# EAGLE board stencil (EAGLE 9.6.2)
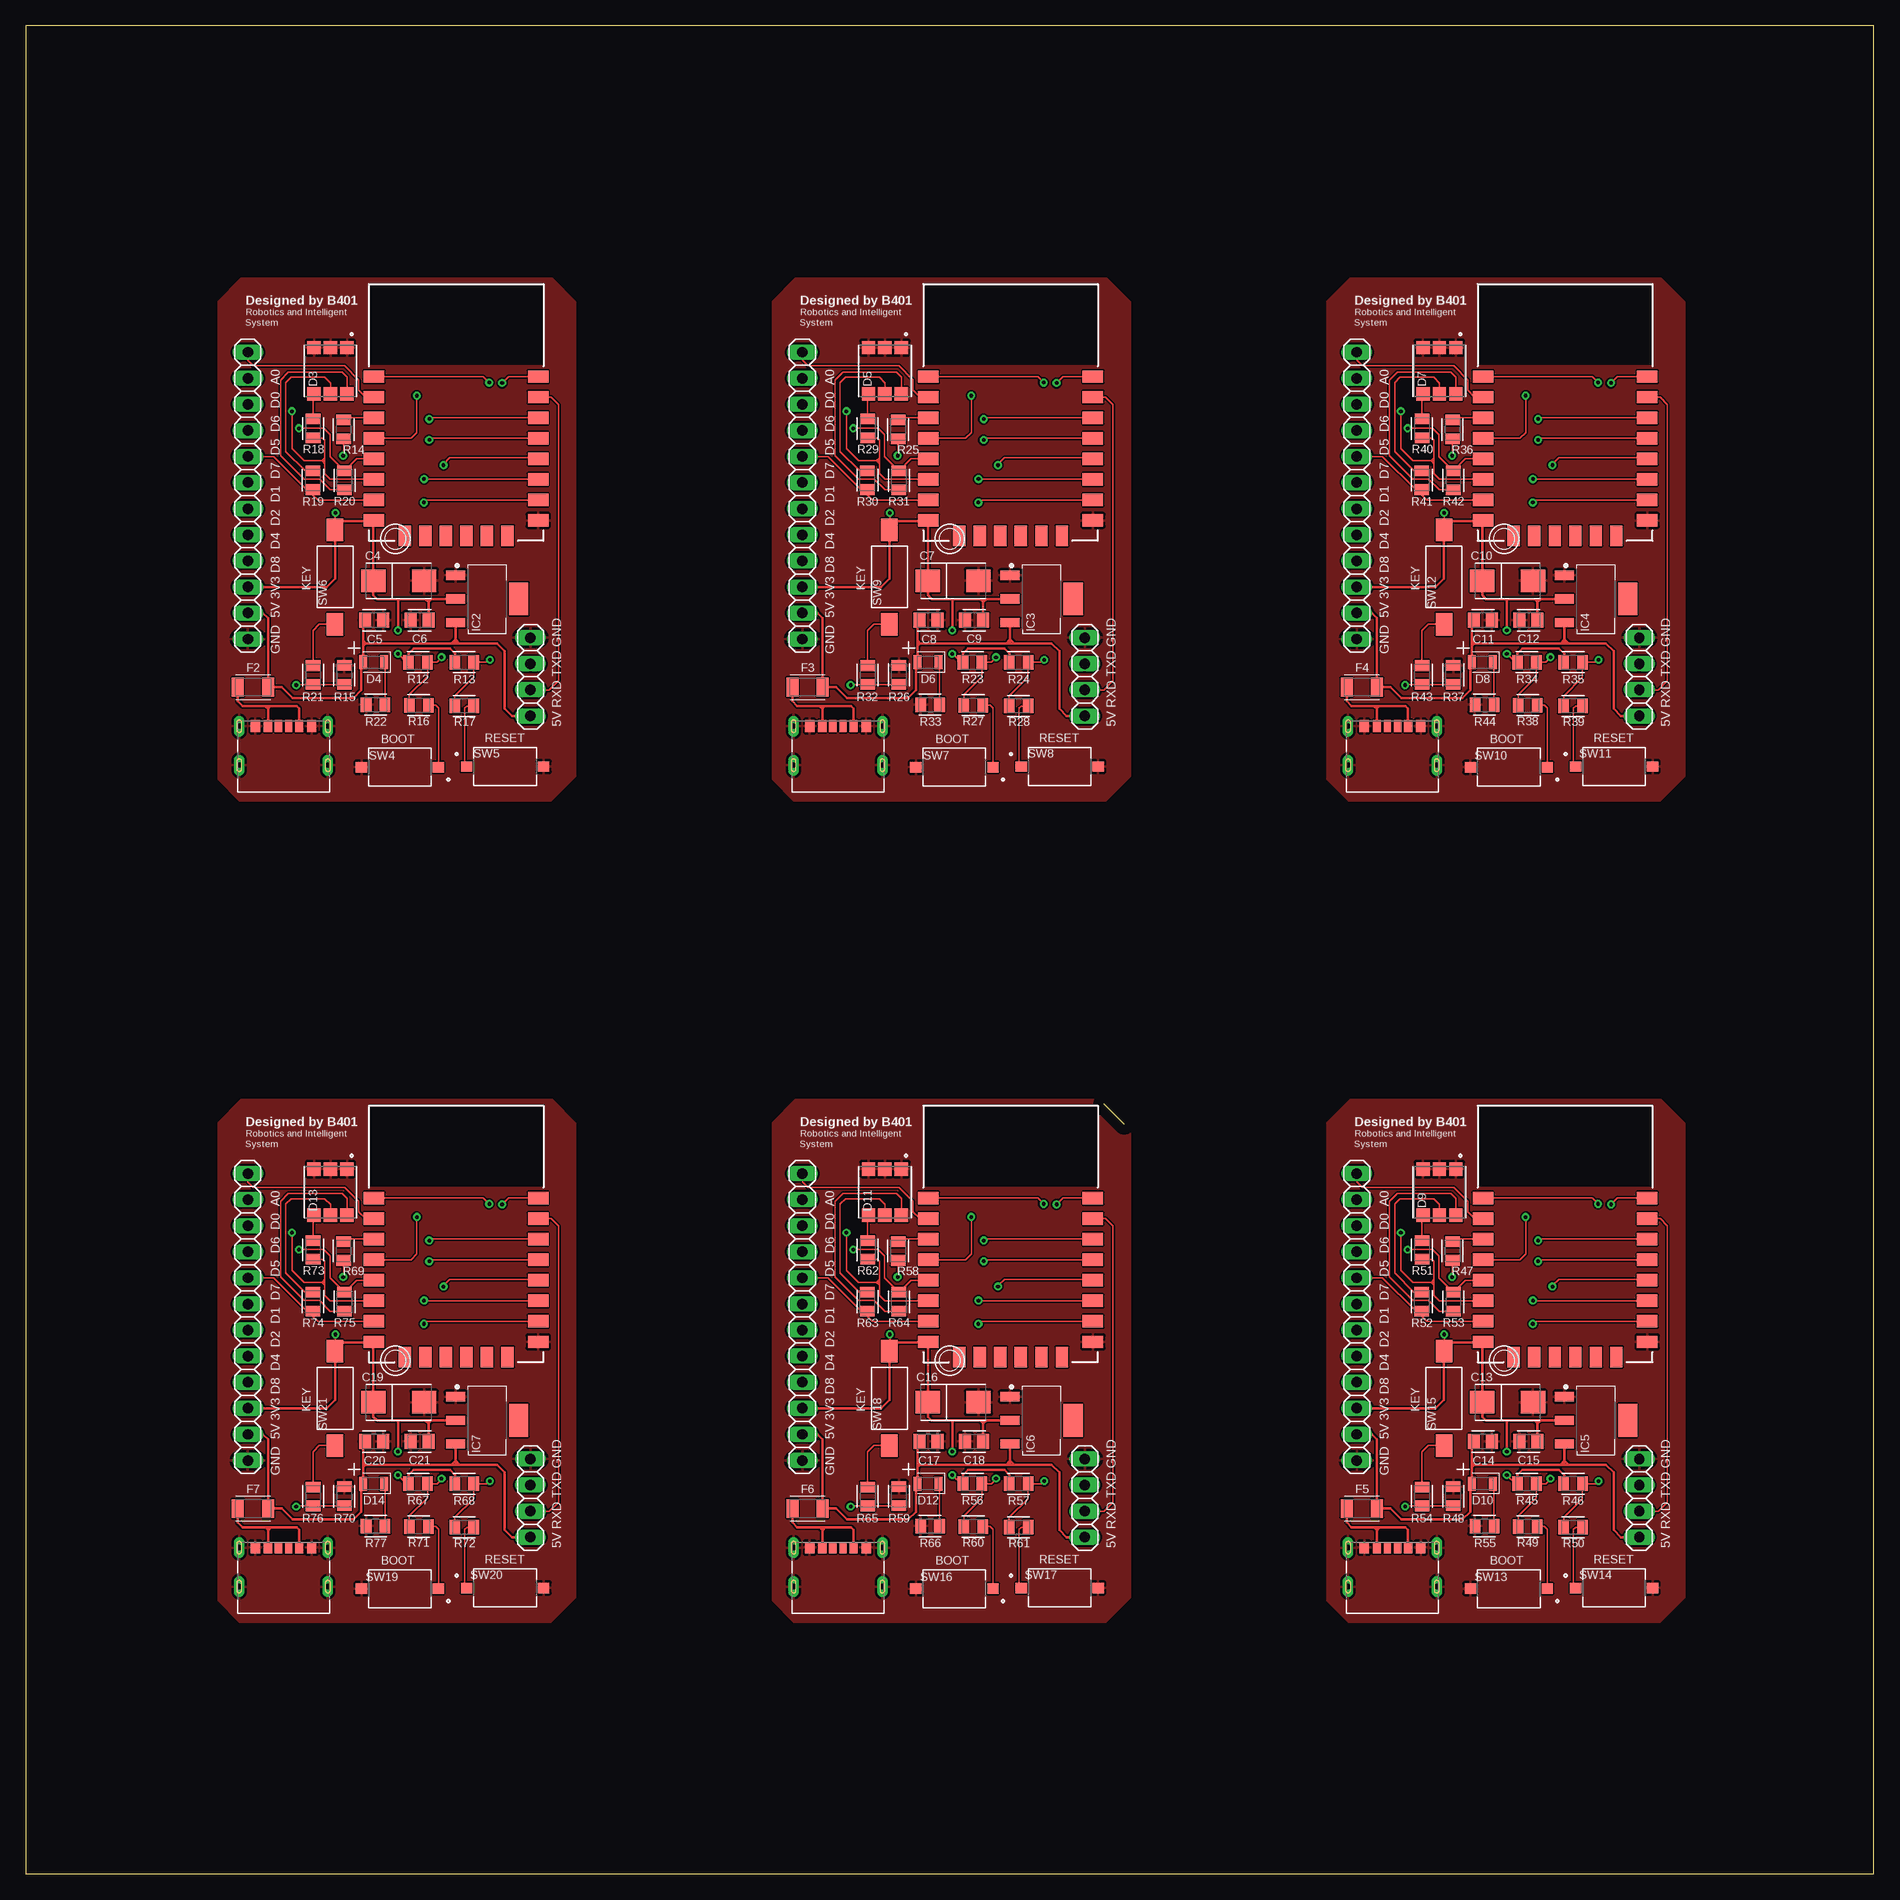
[diagram p0: board, top side]
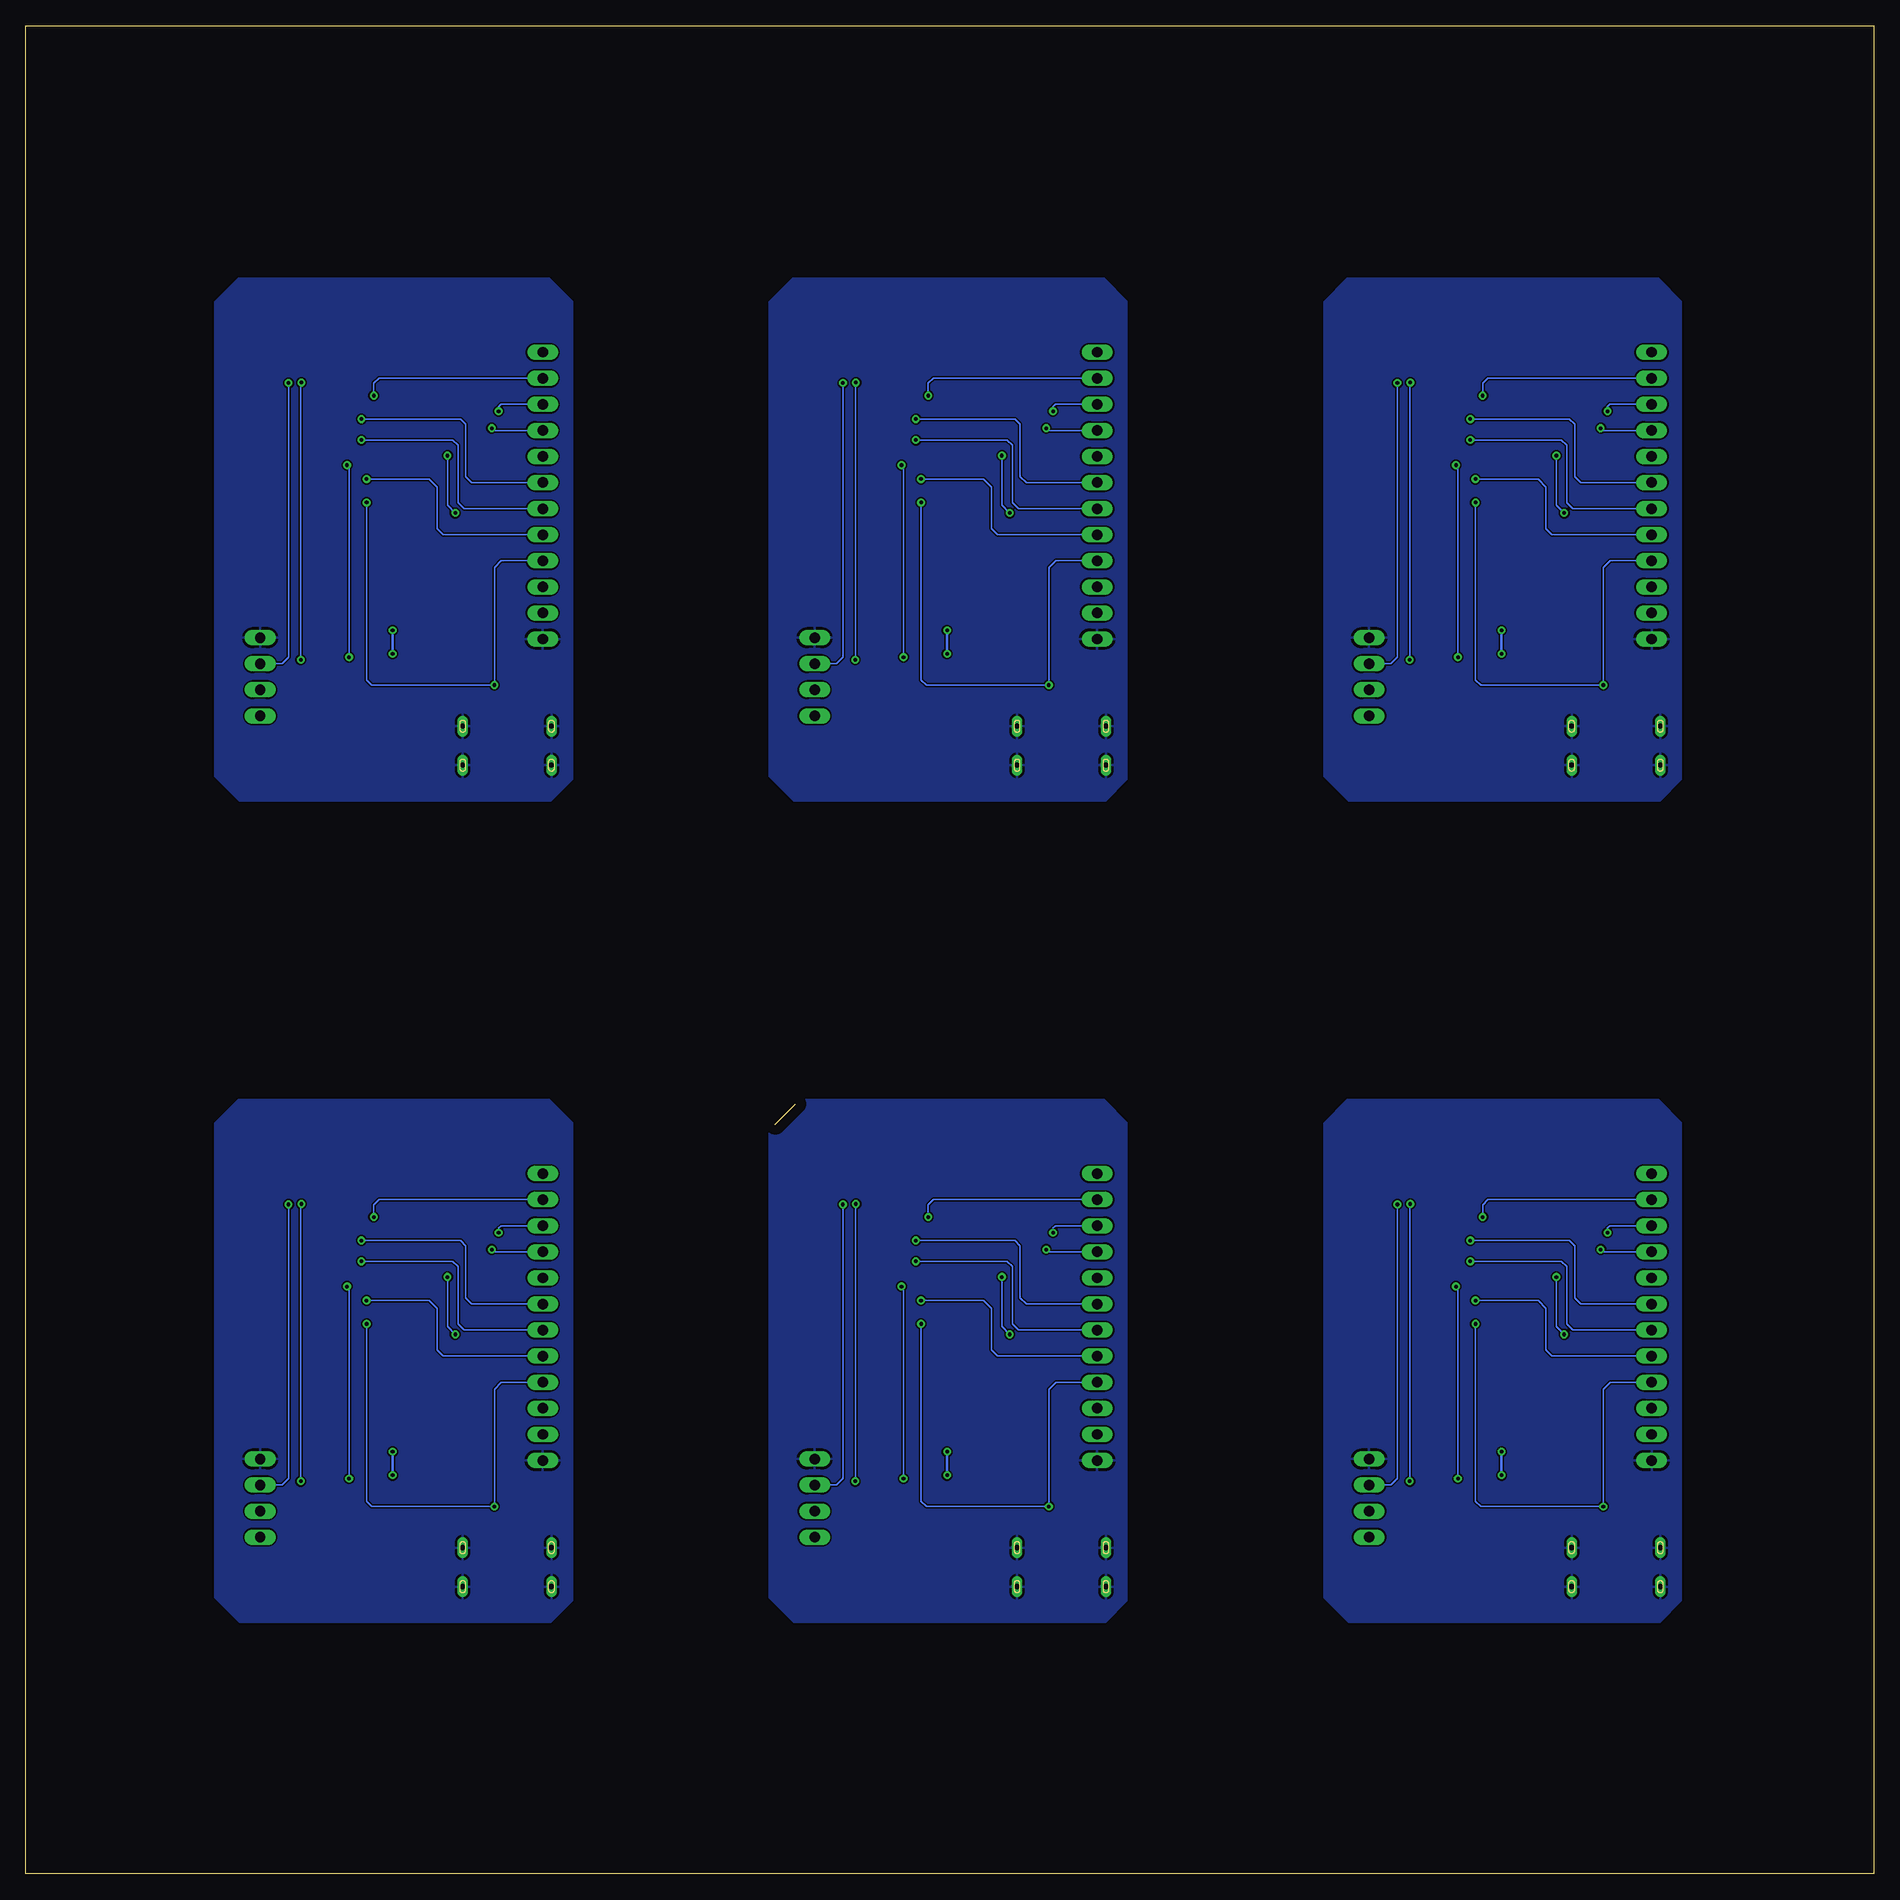
[diagram p1: board, bottom side, seen from below]

Size 180 x 180 mm. Coordinates in mm from the lower left corner, seen from the top.
Outline: 107,73 105,75
Outline: 0,0 180,0 180,180 0,180 0,0
Copper layers (1*16): Top 0.035mm / dielectric 1.5mm / Bottom 0.035mm
Design rules "default *": minimum track width 6mil, minimum drill 0.3mm, track to track 6mil, track to pad 6mil, pad to pad 6mil, via to via 6mil, smd to smd 6mil, copper to edge 40mil, drill to drill 6mil, minimum pad ring 10mil, minimum via ring 8mil, stop-mask expansion 4mil, vias tented up to drill 0mil, thermal gap 10mil

## Footprints (pad centres in the part's own frame; a part is rotated, then mirrored left to right if it is on the bottom)
1X12 = drill 1.016 long: 1 -13.97,0; 2 -11.43,0; 3 -8.89,0; 4 -6.35,0; 5 -3.81,0; 6 -1.27,0; 7 1.27,0; 8 3.81,0; 9 6.35,0; 10 8.89,0; 11 11.43,0; 12 13.97,0
CAPM6032X280 = smd 2.368 x 2.204: 1 -2.471,0; 2 2.471,0
CAPC2012X110 = smd 1.165 x 1.465: 1 -0.875,0; 2 0.875,0
RGB-5050 = smd 1.3 x 1.3: 1 -2.25,1.6; 2 -2.25,0; 3 -2.25,-1.6; 4 2.25,-1.6; 5 2.25,0; 6 2.25,1.6
LEDC2012X110N_FLAT-R = smd 0.762 x 1.362: A 1.025,0; C -1.025,0
ESP-12F = smd 2 x 1.2: 1 -8,3.48; 2 -8,1.48; 3 -8,-0.52; 4 -8,-2.52; 5 -8,-4.52; 6 -8,-6.52; 7 -8,-8.52; 8 -8,-10.52; 15 8,-10.52; 16 8,-8.52; 17 8,-6.52; 18 8,-4.52; 19 8,-2.52; 20 8,-0.52; 21 8,1.48; 22 8,3.48 | smd 1.2 x 2: 9 -5,-12; 10 -3,-12; 11 -1,-12; 12 1,-12; 13 3,-12; 14 5,-12
FUSC3215X82N = smd 1.165 x 1.814: 1 -1.475,0; 2 1.475,0
SOT230P700X170-4 = smd 1.86 x 0.898: 1 -3.075,2.3; 2 -3.075,0; 3 -3.075,-2.3 | smd 1.86 x 3.189: 4 3.075,0
SOCKET-C = smd 0.7 x 1.15: A5 -0.5,0.005; B5 0.5,0.005 | smd 0.8 x 1.15: A9 1.52,0.005; B9 -1.52,0.005 | smd 0.9 x 1.15: A12 2.75,0.005; B12 -2.75,0.005 | drill 0.5 pad 1 long: S1 -4.32,0; S2 4.32,0; S3 -4.32,-3.8; S4 4.32,-3.8
RESC2012X65 = smd 1.031 x 1.42: 1 -0.919,0; 2 0.919,0
SWITCH-2P = smd 1.1 x 1: 1 -3.75,0; 2 3.75,0
SW_1437566-3 = smd 2.18 x 1.6: 1 -4.6,0; 2 4.6,0
1X04 = drill 1.016 long: 1 -3.81,0; 2 -1.27,0; 3 1.27,0; 4 3.81,0

## Placement (x,y rotation side)
BREAKOUT1  PINHD-1X12-BACKUP_1X12M  [1X12]  21.64,134.23 90 top
BREAKOUT2  PINHD-1X12-BACKUP_1X12M  [1X12]  75.64,134.23 90 top
BREAKOUT3  PINHD-1X12-BACKUP_1X12M  [1X12]  129.64,134.23 90 top
BREAKOUT4  PINHD-1X12-BACKUP_1X12M  [1X12]  129.64,54.23 90 top
BREAKOUT5  PINHD-1X12-BACKUP_1X12M  [1X12]  75.64,54.23 90 top
BREAKOUT6  PINHD-1X12-BACKUP_1X12M  [1X12]  21.64,54.23 90 top
C4  100µ  [CAPM6032X280]  36.33,125.93 180 top
C5  10µ  [CAPC2012X110]  33.94,122.11 0 top
C6  10µ  [CAPC2012X110]  38.37,122.1 180 top
C7  100µ  [CAPM6032X280]  90.33,125.93 180 top
C8  10µ  [CAPC2012X110]  87.94,122.11 0 top
C9  10µ  [CAPC2012X110]  92.37,122.1 180 top
C10  100µ  [CAPM6032X280]  144.33,125.93 180 top
C11  10µ  [CAPC2012X110]  141.94,122.11 0 top
C12  10µ  [CAPC2012X110]  146.37,122.1 180 top
C13  100µ  [CAPM6032X280]  144.33,45.93 180 top
C14  10µ  [CAPC2012X110]  141.94,42.11 0 top
C15  10µ  [CAPC2012X110]  146.37,42.1 180 top
C16  100µ  [CAPM6032X280]  90.33,45.93 180 top
C17  10µ  [CAPC2012X110]  87.94,42.11 0 top
C18  10µ  [CAPC2012X110]  92.37,42.1 180 top
C19  100µ  [CAPM6032X280]  36.33,45.93 180 top
C20  10µ  [CAPC2012X110]  33.94,42.11 0 top
C21  10µ  [CAPC2012X110]  38.37,42.1 180 top
D3  RGB-5050  [RGB-5050]  29.69,146.39 270 top
D4  LED_RED  [LEDC2012X110N_FLAT-R]  33.88,118 180 top
D5  RGB-5050  [RGB-5050]  83.69,146.39 270 top
D6  LED_RED  [LEDC2012X110N_FLAT-R]  87.88,118 180 top
D7  RGB-5050  [RGB-5050]  137.69,146.39 270 top
D8  LED_RED  [LEDC2012X110N_FLAT-R]  141.88,118 180 top
D9  RGB-5050  [RGB-5050]  137.69,66.39 270 top
D10  LED_RED  [LEDC2012X110N_FLAT-R]  141.88,38 180 top
D11  RGB-5050  [RGB-5050]  83.69,66.39 270 top
D12  LED_RED  [LEDC2012X110N_FLAT-R]  87.88,38 180 top
D13  RGB-5050  [RGB-5050]  29.69,66.39 270 top
D14  LED_RED  [LEDC2012X110N_FLAT-R]  33.88,38 180 top
ESP-12E/F1  ESP-12F  [ESP-12F]  41.93,142.33 0 top
ESP-12E/F2  ESP-12F  [ESP-12F]  95.93,142.33 0 top
ESP-12E/F3  ESP-12F  [ESP-12F]  149.93,142.33 0 top
ESP-12E/F4  ESP-12F  [ESP-12F]  149.93,62.33 0 top
ESP-12E/F5  ESP-12F  [ESP-12F]  95.93,62.33 0 top
ESP-12E/F6  ESP-12F  [ESP-12F]  41.93,62.33 0 top
F2  FUSE PTC 1A  [FUSC3215X82N]  22.14,115.58 180 top
F3  FUSE PTC 1A  [FUSC3215X82N]  76.14,115.58 180 top
F4  FUSE PTC 1A  [FUSC3215X82N]  130.14,115.58 180 top
F5  FUSE PTC 1A  [FUSC3215X82N]  130.14,35.58 180 top
F6  FUSE PTC 1A  [FUSC3215X82N]  76.14,35.58 180 top
F7  FUSE PTC 1A  [FUSC3215X82N]  22.14,35.58 180 top
IC2  NCP1117ST33T3G  [SOT230P700X170-4]  44.95,124.17 0 top
IC3  NCP1117ST33T3G  [SOT230P700X170-4]  98.95,124.17 0 top
IC4  NCP1117ST33T3G  [SOT230P700X170-4]  152.95,124.17 0 top
IC5  NCP1117ST33T3G  [SOT230P700X170-4]  152.95,44.17 0 top
IC6  NCP1117ST33T3G  [SOT230P700X170-4]  98.95,44.17 0 top
IC7  NCP1117ST33T3G  [SOT230P700X170-4]  44.95,44.17 0 top
POWER1  SOCKET-C  [SOCKET-C]  25.12,111.77 0 top
POWER2  SOCKET-C  [SOCKET-C]  79.12,111.77 0 top
POWER3  SOCKET-C  [SOCKET-C]  133.12,111.77 0 top
POWER4  SOCKET-C  [SOCKET-C]  133.12,31.77 0 top
POWER5  SOCKET-C  [SOCKET-C]  79.12,31.77 0 top
POWER6  SOCKET-C  [SOCKET-C]  25.12,31.77 0 top
R12  10K  [RESC2012X65]  38.21,118 180 top
R13  10k  [RESC2012X65]  42.71,118 180 top
R14  10K  [RESC2012X65]  30.97,140.67 270 top
R15  10K  [RESC2012X65]  31.04,116.78 90 top
R16  470  [RESC2012X65]  38.29,113.82 0 top
R17  470  [RESC2012X65]  42.71,113.75 0 top
R18  100  [RESC2012X65]  28,140.77 90 top
R19  100  [RESC2012X65]  27.98,135.73 90 top
R20  100  [RESC2012X65]  31.05,135.72 270 top
R21  470  [RESC2012X65]  28,116.75 270 top
R22  100  [RESC2012X65]  34.08,113.87 0 top
R23  10K  [RESC2012X65]  92.21,118 180 top
R24  10k  [RESC2012X65]  96.71,118 180 top
R25  10K  [RESC2012X65]  84.97,140.67 270 top
R26  10K  [RESC2012X65]  85.04,116.78 90 top
R27  470  [RESC2012X65]  92.29,113.82 0 top
R28  470  [RESC2012X65]  96.71,113.75 0 top
R29  100  [RESC2012X65]  82,140.77 90 top
R30  100  [RESC2012X65]  81.98,135.73 90 top
R31  100  [RESC2012X65]  85.05,135.72 270 top
R32  470  [RESC2012X65]  82,116.75 270 top
R33  100  [RESC2012X65]  88.08,113.87 0 top
R34  10K  [RESC2012X65]  146.21,118 180 top
R35  10k  [RESC2012X65]  150.71,118 180 top
R36  10K  [RESC2012X65]  138.97,140.67 270 top
R37  10K  [RESC2012X65]  139.04,116.78 90 top
R38  470  [RESC2012X65]  146.29,113.82 0 top
R39  470  [RESC2012X65]  150.71,113.75 0 top
R40  100  [RESC2012X65]  136,140.77 90 top
R41  100  [RESC2012X65]  135.98,135.73 90 top
R42  100  [RESC2012X65]  139.05,135.72 270 top
R43  470  [RESC2012X65]  136,116.75 270 top
R44  100  [RESC2012X65]  142.08,113.87 0 top
R45  10K  [RESC2012X65]  146.21,38 180 top
R46  10k  [RESC2012X65]  150.71,38 180 top
R47  10K  [RESC2012X65]  138.97,60.67 270 top
R48  10K  [RESC2012X65]  139.04,36.78 90 top
R49  470  [RESC2012X65]  146.29,33.82 0 top
R50  470  [RESC2012X65]  150.71,33.75 0 top
R51  100  [RESC2012X65]  136,60.77 90 top
R52  100  [RESC2012X65]  135.98,55.73 90 top
R53  100  [RESC2012X65]  139.05,55.72 270 top
R54  470  [RESC2012X65]  136,36.75 270 top
R55  100  [RESC2012X65]  142.08,33.87 0 top
R56  10K  [RESC2012X65]  92.21,38 180 top
R57  10k  [RESC2012X65]  96.71,38 180 top
R58  10K  [RESC2012X65]  84.97,60.67 270 top
R59  10K  [RESC2012X65]  85.04,36.78 90 top
R60  470  [RESC2012X65]  92.29,33.82 0 top
R61  470  [RESC2012X65]  96.71,33.75 0 top
R62  100  [RESC2012X65]  82,60.77 90 top
R63  100  [RESC2012X65]  81.98,55.73 90 top
R64  100  [RESC2012X65]  85.05,55.72 270 top
R65  470  [RESC2012X65]  82,36.75 270 top
R66  100  [RESC2012X65]  88.08,33.87 0 top
R67  10K  [RESC2012X65]  38.21,38 180 top
R68  10k  [RESC2012X65]  42.71,38 180 top
R69  10K  [RESC2012X65]  30.97,60.67 270 top
R70  10K  [RESC2012X65]  31.04,36.78 90 top
R71  470  [RESC2012X65]  38.29,33.82 0 top
R72  470  [RESC2012X65]  42.71,33.75 0 top
R73  100  [RESC2012X65]  28,60.77 90 top
R74  100  [RESC2012X65]  27.98,55.73 90 top
R75  100  [RESC2012X65]  31.05,55.72 270 top
R76  470  [RESC2012X65]  28,36.75 270 top
R77  100  [RESC2012X65]  34.08,33.87 0 top
SW4  SWITCH-2P  [SWITCH-2P]  36.45,107.78 180 top
SW5  SWITCH-2P  [SWITCH-2P]  46.7,107.84 0 top
SW6  SWITCH  [SW_1437566-3]  30.13,126.31 90 top
SW7  SWITCH-2P  [SWITCH-2P]  90.45,107.78 180 top
SW8  SWITCH-2P  [SWITCH-2P]  100.7,107.84 0 top
SW9  SWITCH  [SW_1437566-3]  84.13,126.31 90 top
SW10  SWITCH-2P  [SWITCH-2P]  144.45,107.78 180 top
SW11  SWITCH-2P  [SWITCH-2P]  154.7,107.84 0 top
SW12  SWITCH  [SW_1437566-3]  138.13,126.31 90 top
SW13  SWITCH-2P  [SWITCH-2P]  144.45,27.78 180 top
SW14  SWITCH-2P  [SWITCH-2P]  154.7,27.84 0 top
SW15  SWITCH  [SW_1437566-3]  138.13,46.31 90 top
SW16  SWITCH-2P  [SWITCH-2P]  90.45,27.78 180 top
SW17  SWITCH-2P  [SWITCH-2P]  100.7,27.84 0 top
SW18  SWITCH  [SW_1437566-3]  84.13,46.31 90 top
SW19  SWITCH-2P  [SWITCH-2P]  36.45,27.78 180 top
SW20  SWITCH-2P  [SWITCH-2P]  46.7,27.84 0 top
SW21  SWITCH  [SW_1437566-3]  30.13,46.31 90 top
UART1  PINHD-1X04_1X04M  [1X04]  49.16,116.59 270 top
UART2  PINHD-1X04_1X04M  [1X04]  103.16,116.59 270 top
UART3  PINHD-1X04_1X04M  [1X04]  157.16,116.59 270 top
UART4  PINHD-1X04_1X04M  [1X04]  157.16,36.59 270 top
UART5  PINHD-1X04_1X04M  [1X04]  103.16,36.59 270 top
UART6  PINHD-1X04_1X04M  [1X04]  49.16,36.59 270 top

## Library data of the parts
BREAKOUT1-BREAKOUT6 UART1-UART6 = Tinkercad
C4-C21 = Capacitor; CATEGORY: Capacitor
D3 D5 D7 D9 D11 D13 = WorTel2023; MANUFACTURER: Lite-On; MAXIMUM_PACKAGE_HEIGHT: 1.8 mm; PARTREV: D; STANDARD: Manufacturer Recommendations
D4 D6 D8 D10 D12 D14 = LED; CATEGORY: LED; COLOR: RED; DESCRIPTION: CHIP LED FLAT; SUB-CATEGORY: CHIP; TYPE: FLAT_TOP
ESP-12E/F1-ESP-12E/F6 = WorTel2023
F2-F7 = Circuit-Protection; CATEGORY: Circuit-Protection; SUB-CATEGORY: Fuse
IC2-IC7 = IC_Power-Management; CATEGORY: IC_Power-Management; MANUFACTURER: ON Semiconductor; MPN: NCP1117ST33T3G; OPERATING_TEMP: 0 to +125 °C; PART_STATUS: Active; ROHS_COMPLIANT: RoHS3 Compliant; SERIES: NCP1117, NCV1117; SUB-CATEGORY: Voltage Regulator; TYPE: Linear
POWER1-POWER6 = WorTel2023; MANUFACTURER: CUI Devices; MAXIMUM_PACKAGE_HEIGHT: 3.16mm; PARTREV: 04/30/2020; STANDARD: Manufacturer recommendations
R12-R77 = Resistor; CATEGORY: Resistor; SUB-CATEGORY: Fixed
SW4 SW5 SW7 SW8 SW10 SW11 SW13 SW14 SW16 SW17 SW19 SW20 = WorTel2023; MANUFACTURER: CUI Devices; MAXIMUM_PACKAGE_HEIGHT: 2.5 mm; PARTREV: 1.0; STANDARD: Manufacturer Recommendations
SW6 SW9 SW12 SW15 SW18 SW21 = XLKM#4; MANUFACTURER: TE CONNECTIVITY; PARTREV: C2; STANDARD: Manufacturer recommendations

## Nets
+3.3V1: BREAKOUT1.3 C4.2 C6.1 ESP-12E/F1.8 IC2.2 R12.2 R13.2 R14.2 SW6.2
+3.3V2: BREAKOUT2.3 C7.2 C9.1 ESP-12E/F2.8 IC3.2 R23.2 R24.2 R25.2 SW9.2
+3.3V3: BREAKOUT3.3 C10.2 C12.1 ESP-12E/F3.8 IC4.2 R34.2 R35.2 R36.2 SW12.2
+3.3V4: BREAKOUT4.3 C13.2 C15.1 ESP-12E/F4.8 IC5.2 R45.2 R46.2 R47.2 SW15.2
+3.3V5: BREAKOUT5.3 C16.2 C18.1 ESP-12E/F5.8 IC6.2 R56.2 R57.2 R58.2 SW18.2
+3.3V6: BREAKOUT6.3 C19.2 C21.1 ESP-12E/F6.8 IC7.2 R67.2 R68.2 R69.2 SW21.2
+5V1: BREAKOUT1.2 C5.1 D4.A F2.1 IC2.3 UART1.4
+5V2: BREAKOUT2.2 C8.1 D6.A F3.1 IC3.3 UART2.4
+5V3: BREAKOUT3.2 C11.1 D8.A F4.1 IC4.3 UART3.4
+5V4: BREAKOUT4.2 C14.1 D10.A F5.1 IC5.3 UART4.4
+5V5: BREAKOUT5.2 C17.1 D12.A F6.1 IC6.3 UART5.4
+5V6: BREAKOUT6.2 C20.1 D14.A F7.1 IC7.3 UART6.4
+5V_FUSE1: F2.2 POWER1.A9 POWER1.B9
+5V_FUSE2: F3.2 POWER2.A9 POWER2.B9
+5V_FUSE3: F4.2 POWER3.A9 POWER3.B9
+5V_FUSE4: F5.2 POWER4.A9 POWER4.B9
+5V_FUSE5: F6.2 POWER5.A9 POWER5.B9
+5V_FUSE6: F7.2 POWER6.A9 POWER6.B9
ADC1: BREAKOUT1.12 ESP-12E/F1.2
ADC2: BREAKOUT2.12 ESP-12E/F2.2
ADC3: BREAKOUT3.12 ESP-12E/F3.2
ADC4: BREAKOUT4.12 ESP-12E/F4.2
ADC5: BREAKOUT5.12 ESP-12E/F5.2
ADC6: BREAKOUT6.12 ESP-12E/F6.2
EN1: ESP-12E/F1.3 R14.1
EN2: ESP-12E/F2.3 R25.1
EN3: ESP-12E/F3.3 R36.1
EN4: ESP-12E/F4.3 R47.1
EN5: ESP-12E/F5.3 R58.1
EN6: ESP-12E/F6.3 R69.1
GND1: BREAKOUT1.1 C4.1 C5.2 C6.2 D3.1 D3.2 D3.3 ESP-12E/F1.15 IC2.1 POWER1.A12 POWER1.B12 POWER1.S1 POWER1.S2 POWER1.S3 POWER1.S4 R15.2 R22.1 SW4.2 SW5.2 UART1.1
GND2: BREAKOUT2.1 C7.1 C8.2 C9.2 D5.1 D5.2 D5.3 ESP-12E/F2.15 IC3.1 POWER2.A12 POWER2.B12 POWER2.S1 POWER2.S2 POWER2.S3 POWER2.S4 R26.2 R33.1 SW7.2 SW8.2 UART2.1
GND3: BREAKOUT3.1 C10.1 C11.2 C12.2 D7.1 D7.2 D7.3 ESP-12E/F3.15 IC4.1 POWER3.A12 POWER3.B12 POWER3.S1 POWER3.S2 POWER3.S3 POWER3.S4 R37.2 R44.1 SW10.2 SW11.2 UART3.1
GND4: BREAKOUT4.1 C13.1 C14.2 C15.2 D9.1 D9.2 D9.3 ESP-12E/F4.15 IC5.1 POWER4.A12 POWER4.B12 POWER4.S1 POWER4.S2 POWER4.S3 POWER4.S4 R48.2 R55.1 SW13.2 SW14.2 UART4.1
GND5: BREAKOUT5.1 C16.1 C17.2 C18.2 D11.1 D11.2 D11.3 ESP-12E/F5.15 IC6.1 POWER5.A12 POWER5.B12 POWER5.S1 POWER5.S2 POWER5.S3 POWER5.S4 R59.2 R66.1 SW16.2 SW17.2 UART5.1
GND6: BREAKOUT6.1 C19.1 C20.2 C21.2 D13.1 D13.2 D13.3 ESP-12E/F6.15 IC7.1 POWER6.A12 POWER6.B12 POWER6.S1 POWER6.S2 POWER6.S3 POWER6.S4 R70.2 R77.1 SW19.2 SW20.2 UART6.1
IO1: ESP-12E/F1.18 R12.1 R16.1
IO3: BREAKOUT1.10 ESP-12E/F1.6 R18.1
IO6: BREAKOUT1.8 ESP-12E/F1.7 R19.1
IO7: BREAKOUT1.9 ESP-12E/F1.5 R20.1
IO8: BREAKOUT1.6 ESP-12E/F1.19
IO9: BREAKOUT1.7 ESP-12E/F1.20
IO10: BREAKOUT1.11 ESP-12E/F1.4
IO11: BREAKOUT1.5 ESP-12E/F1.17
IO17: BREAKOUT1.4 ESP-12E/F1.16 R15.1 R21.2
IO18: ESP-12E/F2.18 R23.1 R27.1
IO19: BREAKOUT2.10 ESP-12E/F2.6 R29.1
IO20: BREAKOUT2.8 ESP-12E/F2.7 R30.1
IO21: BREAKOUT2.9 ESP-12E/F2.5 R31.1
IO22: BREAKOUT2.6 ESP-12E/F2.19
IO23: BREAKOUT2.7 ESP-12E/F2.20
IO24: BREAKOUT2.11 ESP-12E/F2.4
IO25: BREAKOUT2.5 ESP-12E/F2.17
IO26: BREAKOUT2.4 ESP-12E/F2.16 R26.1 R32.2
IO27: ESP-12E/F3.18 R34.1 R38.1
IO28: BREAKOUT3.10 ESP-12E/F3.6 R40.1
IO29: BREAKOUT3.8 ESP-12E/F3.7 R41.1
IO30: BREAKOUT3.9 ESP-12E/F3.5 R42.1
IO31: BREAKOUT3.6 ESP-12E/F3.19
IO32: BREAKOUT3.7 ESP-12E/F3.20
IO33: BREAKOUT3.11 ESP-12E/F3.4
IO34: BREAKOUT3.5 ESP-12E/F3.17
IO35: BREAKOUT3.4 ESP-12E/F3.16 R37.1 R43.2
IO36: ESP-12E/F4.18 R45.1 R49.1
IO37: BREAKOUT4.10 ESP-12E/F4.6 R51.1
IO38: BREAKOUT4.8 ESP-12E/F4.7 R52.1
IO39: BREAKOUT4.9 ESP-12E/F4.5 R53.1
IO40: BREAKOUT4.6 ESP-12E/F4.19
IO41: BREAKOUT4.7 ESP-12E/F4.20
IO42: BREAKOUT4.11 ESP-12E/F4.4
IO43: BREAKOUT4.5 ESP-12E/F4.17
IO44: BREAKOUT4.4 ESP-12E/F4.16 R48.1 R54.2
IO45: ESP-12E/F5.18 R56.1 R60.1
IO46: BREAKOUT5.10 ESP-12E/F5.6 R62.1
IO47: BREAKOUT5.8 ESP-12E/F5.7 R63.1
IO48: BREAKOUT5.9 ESP-12E/F5.5 R64.1
IO49: BREAKOUT5.6 ESP-12E/F5.19
IO50: BREAKOUT5.7 ESP-12E/F5.20
IO51: BREAKOUT5.11 ESP-12E/F5.4
IO52: BREAKOUT5.5 ESP-12E/F5.17
IO53: BREAKOUT5.4 ESP-12E/F5.16 R59.1 R65.2
IO54: ESP-12E/F6.18 R67.1 R71.1
IO55: BREAKOUT6.10 ESP-12E/F6.6 R73.1
IO56: BREAKOUT6.8 ESP-12E/F6.7 R74.1
IO57: BREAKOUT6.9 ESP-12E/F6.5 R75.1
IO58: BREAKOUT6.6 ESP-12E/F6.19
IO59: BREAKOUT6.7 ESP-12E/F6.20
IO60: BREAKOUT6.11 ESP-12E/F6.4
IO61: BREAKOUT6.5 ESP-12E/F6.17
IO62: BREAKOUT6.4 ESP-12E/F6.16 R70.1 R76.2
N$1: R16.2 SW4.1
N$8: R17.2 SW5.1
N$10: D3.4 R18.2
N$11: D3.5 R19.2
N$12: D3.6 R20.2
N$13: R21.1 SW6.1
N$14: D4.C R22.2
N$15: R27.2 SW7.1
N$16: R28.2 SW8.1
N$17: D5.4 R29.2
N$18: D5.5 R30.2
N$19: D5.6 R31.2
N$20: R32.1 SW9.1
N$21: D6.C R33.2
N$22: R38.2 SW10.1
N$23: R39.2 SW11.1
N$24: D7.4 R40.2
N$25: D7.5 R41.2
N$26: D7.6 R42.2
N$27: R43.1 SW12.1
N$28: D8.C R44.2
N$29: R49.2 SW13.1
N$30: R50.2 SW14.1
N$31: D9.4 R51.2
N$32: D9.5 R52.2
N$33: D9.6 R53.2
N$34: R54.1 SW15.1
N$35: D10.C R55.2
N$36: R60.2 SW16.1
N$37: R61.2 SW17.1
N$38: D11.4 R62.2
N$39: D11.5 R63.2
N$40: D11.6 R64.2
N$41: R65.1 SW18.1
N$42: D12.C R66.2
N$43: R71.2 SW19.1
N$44: R72.2 SW20.1
N$45: D13.4 R73.2
N$46: D13.5 R74.2
N$47: D13.6 R75.2
N$48: R76.1 SW21.1
N$49: D14.C R77.2
RST1: ESP-12E/F1.1 R13.1 R17.1
RST2: ESP-12E/F2.1 R24.1 R28.1
RST3: ESP-12E/F3.1 R35.1 R39.1
RST4: ESP-12E/F4.1 R46.1 R50.1
RST5: ESP-12E/F5.1 R57.1 R61.1
RST6: ESP-12E/F6.1 R68.1 R72.1
RXD1: ESP-12E/F1.21 UART1.3
RXD2: ESP-12E/F2.21 UART2.3
RXD3: ESP-12E/F3.21 UART3.3
RXD4: ESP-12E/F4.21 UART4.3
RXD5: ESP-12E/F5.21 UART5.3
RXD6: ESP-12E/F6.21 UART6.3
TXD1: ESP-12E/F1.22 UART1.2
TXD2: ESP-12E/F2.22 UART2.2
TXD3: ESP-12E/F3.22 UART3.2
TXD4: ESP-12E/F4.22 UART4.2
TXD5: ESP-12E/F5.22 UART5.2
TXD6: ESP-12E/F6.22 UART6.2

## Tracks (layer width: path | path; a pad name or v marks a point on that pad's centre or on a via)
+3.3V1  (via drill 0.35)
  Top 0.152: 30.97,139.35 R14.2 30.97,138.18 v30.92,138.13 | v30.16,132.54 30.16,130.88 30.22,130.82
  Top 0.254: 34.43,126.5 C4.2 | SW6.2 30.22,130.82 30.79,130.25 | IC2.2 39.56,124.17 | 39.56,124.17 39.05,124.17 | 39.05,124.17 38.93,124.17 | 38.93,124.17 36.25,124.17 | 36.25,124.17 34.21,124.17 33.86,124.52 C4.2 | C4.2 33.86,131.75 | 33.86,131.75 ESP-12E/F1.8 | SW6.2 30.97,131.75 32.19,131.75 32.44,131.75 32.7,131.75 33.86,131.75 | C6.1 39.24,123.85 | 39.24,123.85 39.56,124.17 | 39.24,123.85 39.24,123.97 39.05,124.17 | 39.24,123.85 38.93,124.17 | 36.25,124.17 v36.25,121.11 | v36.25,118.82 37.12,117.96 R12.2 37.29,118.85 37.78,119.33 41.33,119.33 41.84,118.82 41.84,117.98 R13.2 41.84,117.86 | SW6.2 30.13,126.16 29.31,125.34 BREAKOUT1.3
  Bottom 0.152: v30.92,138.13 30.92,133.3 v30.16,132.54
  Bottom 0.254: v36.25,121.11 v36.25,118.82
+3.3V2  (via drill 0.35)
  Top 0.152: 84.97,139.35 R25.2 84.97,138.18 v84.92,138.13 | v84.16,132.54 84.16,130.88 84.22,130.82
  Top 0.254: 88.43,126.5 C7.2 | SW9.2 84.22,130.82 84.79,130.25 | IC3.2 93.56,124.17 | 93.56,124.17 93.05,124.17 | 93.05,124.17 92.93,124.17 | 92.93,124.17 90.25,124.17 | 90.25,124.17 88.21,124.17 87.86,124.52 C7.2 | C7.2 87.86,131.75 | 87.86,131.75 ESP-12E/F2.8 | SW9.2 84.97,131.75 86.19,131.75 86.44,131.75 86.7,131.75 87.86,131.75 | C9.1 93.24,123.85 | 93.24,123.85 93.56,124.17 | 93.24,123.85 93.24,123.97 93.05,124.17 | 93.24,123.85 92.93,124.17 | 90.25,124.17 v90.25,121.11 | v90.25,118.82 91.12,117.96 R23.2 91.29,118.85 91.78,119.33 95.33,119.33 95.84,118.82 95.84,117.98 R24.2 95.84,117.86 | SW9.2 84.13,126.16 83.31,125.34 BREAKOUT2.3
  Bottom 0.152: v84.92,138.13 84.92,133.3 v84.16,132.54
  Bottom 0.254: v90.25,121.11 v90.25,118.82
+3.3V3  (via drill 0.35)
  Top 0.152: 138.97,139.35 R36.2 138.97,138.18 v138.92,138.13 | v138.16,132.54 138.16,130.88 138.22,130.82
  Top 0.254: 142.43,126.5 C10.2 | SW12.2 138.22,130.82 138.79,130.25 | IC4.2 147.56,124.17 | 147.56,124.17 147.05,124.17 | 147.05,124.17 146.93,124.17 | 146.93,124.17 144.25,124.17 | 144.25,124.17 142.21,124.17 141.86,124.52 C10.2 | C10.2 141.86,131.75 | 141.86,131.75 ESP-12E/F3.8 | SW12.2 138.97,131.75 140.19,131.75 140.44,131.75 140.7,131.75 141.86,131.75 | C12.1 147.24,123.85 | 147.24,123.85 147.56,124.17 | 147.24,123.85 147.24,123.97 147.05,124.17 | 147.24,123.85 146.93,124.17 | 144.25,124.17 v144.25,121.11 | v144.25,118.82 145.12,117.96 R34.2 145.29,118.85 145.78,119.33 149.33,119.33 149.84,118.82 149.84,117.98 R35.2 149.84,117.86 | SW12.2 138.13,126.16 137.31,125.34 BREAKOUT3.3
  Bottom 0.152: v138.92,138.13 138.92,133.3 v138.16,132.54
  Bottom 0.254: v144.25,121.11 v144.25,118.82
+3.3V4  (via drill 0.35)
  Top 0.152: 138.97,59.35 R47.2 138.97,58.18 v138.92,58.13 | v138.16,52.54 138.16,50.88 138.22,50.82
  Top 0.254: 142.43,46.5 C13.2 | SW15.2 138.22,50.82 138.79,50.25 | IC5.2 147.56,44.17 | 147.56,44.17 147.05,44.17 | 147.05,44.17 146.93,44.17 | 146.93,44.17 144.25,44.17 | 144.25,44.17 142.21,44.17 141.86,44.52 C13.2 | C13.2 141.86,51.74 | 141.86,51.74 ESP-12E/F4.8 | SW15.2 138.97,51.74 140.19,51.74 140.44,51.74 140.7,51.74 141.86,51.74 | C15.1 147.24,43.85 | 147.24,43.85 147.56,44.17 | 147.24,43.85 147.24,43.97 147.05,44.17 | 147.24,43.85 146.93,44.17 | 144.25,44.17 v144.25,41.11 | v144.25,38.82 145.12,37.96 R45.2 145.29,38.85 145.78,39.33 149.33,39.33 149.84,38.82 149.84,37.98 R46.2 149.84,37.86 | SW15.2 138.13,46.16 137.31,45.34 BREAKOUT4.3
  Bottom 0.152: v138.92,58.13 138.92,53.3 v138.16,52.54
  Bottom 0.254: v144.25,41.11 v144.25,38.82
+3.3V5  (via drill 0.35)
  Top 0.152: 84.97,59.35 R58.2 84.97,58.18 v84.92,58.13 | v84.16,52.54 84.16,50.88 84.22,50.82
  Top 0.254: 88.43,46.5 C16.2 | SW18.2 84.22,50.82 84.79,50.25 | IC6.2 93.56,44.17 | 93.56,44.17 93.05,44.17 | 93.05,44.17 92.93,44.17 | 92.93,44.17 90.25,44.17 | 90.25,44.17 88.21,44.17 87.86,44.52 C16.2 | C16.2 87.86,51.74 | 87.86,51.74 ESP-12E/F5.8 | SW18.2 84.97,51.74 86.19,51.74 86.44,51.74 86.7,51.74 87.86,51.74 | C18.1 93.24,43.85 | 93.24,43.85 93.56,44.17 | 93.24,43.85 93.24,43.97 93.05,44.17 | 93.24,43.85 92.93,44.17 | 90.25,44.17 v90.25,41.11 | v90.25,38.82 91.12,37.96 R56.2 91.29,38.85 91.78,39.33 95.33,39.33 95.84,38.82 95.84,37.98 R57.2 95.84,37.86 | SW18.2 84.13,46.16 83.31,45.34 BREAKOUT5.3
  Bottom 0.152: v84.92,58.13 84.92,53.3 v84.16,52.54
  Bottom 0.254: v90.25,41.11 v90.25,38.82
+3.3V6  (via drill 0.35)
  Top 0.152: 30.97,59.35 R69.2 30.97,58.18 v30.92,58.13 | v30.16,52.54 30.16,50.88 30.22,50.82
  Top 0.254: 34.43,46.5 C19.2 | SW21.2 30.22,50.82 30.79,50.25 | IC7.2 39.56,44.17 | 39.56,44.17 39.05,44.17 | 39.05,44.17 38.93,44.17 | 38.93,44.17 36.25,44.17 | 36.25,44.17 34.21,44.17 33.86,44.52 C19.2 | C19.2 33.86,51.74 | 33.86,51.74 ESP-12E/F6.8 | SW21.2 30.97,51.74 32.19,51.74 32.44,51.74 32.7,51.74 33.86,51.74 | C21.1 39.24,43.85 | 39.24,43.85 39.56,44.17 | 39.24,43.85 39.24,43.97 39.05,44.17 | 39.24,43.85 38.93,44.17 | 36.25,44.17 v36.25,41.11 | v36.25,38.82 37.12,37.96 R67.2 37.29,38.85 37.78,39.33 41.33,39.33 41.84,38.82 41.84,37.98 R68.2 41.84,37.86 | SW21.2 30.13,46.16 29.31,45.34 BREAKOUT6.3
  Bottom 0.152: v30.92,58.13 30.92,53.3 v30.16,52.54
  Bottom 0.254: v36.25,41.11 v36.25,38.82
+5V1
  Top 0.254: BREAKOUT1.2 23.1,122.8 23.6,122.3 23.6,115.61 F2.1 24.92,115.58 25.99,114.51 31.94,114.51 32.7,115.27 32.7,118.05 D4.A 32.85,119.59 | C5.1 32.95,122.11 | 32.95,122.11 32.59,122.11 | IC2.3 41.87,120.25 | 41.46,119.84 41.87,120.25 | UART1.4 47.38,112.78 46.67,113.49 46.67,119.08 45.91,119.84 42.28,119.84 | 41.84,119.84 41.46,119.84 | 41.84,119.84 42.28,119.84 | 42.28,119.84 41.87,120.25 | 41.87,120.25 41.87,119.87 41.84,119.84 | 32.85,119.59 32.85,120.09 | 32.85,120.09 32.85,122.01 32.95,122.11 | 41.46,119.84 33.11,119.84 | 33.11,119.84 32.85,120.09 | 33.11,119.84 32.85,119.59
+5V2
  Top 0.254: BREAKOUT2.2 77.1,122.8 77.6,122.3 77.6,115.61 F3.1 78.92,115.58 79.99,114.51 85.94,114.51 86.7,115.27 86.7,118.05 D6.A 86.86,119.59 | C8.1 86.95,122.11 | 86.95,122.11 86.59,122.11 | IC3.3 95.87,120.25 | 95.46,119.84 95.87,120.25 | UART2.4 101.38,112.78 100.67,113.49 100.67,119.08 99.91,119.84 96.28,119.84 | 95.84,119.84 95.46,119.84 | 95.84,119.84 96.28,119.84 | 96.28,119.84 95.87,120.25 | 95.87,120.25 95.87,119.87 95.84,119.84 | 86.86,119.59 86.86,120.09 | 86.86,120.09 86.86,122.01 86.95,122.11 | 95.46,119.84 87.11,119.84 | 87.11,119.84 86.86,120.09 | 87.11,119.84 86.86,119.59
+5V3
  Top 0.254: BREAKOUT3.2 131.1,122.8 131.6,122.3 131.6,115.61 F4.1 132.92,115.58 133.99,114.51 139.94,114.51 140.7,115.27 140.7,118.05 D8.A 140.85,119.59 | C11.1 140.95,122.11 | 140.95,122.11 140.59,122.11 | IC4.3 149.87,120.25 | 149.46,119.84 149.87,120.25 | UART3.4 155.38,112.78 154.67,113.49 154.67,119.08 153.91,119.84 150.28,119.84 | 149.84,119.84 149.46,119.84 | 149.84,119.84 150.28,119.84 | 150.28,119.84 149.87,120.25 | 149.87,120.25 149.87,119.87 149.84,119.84 | 140.85,119.59 140.85,120.09 | 140.85,120.09 140.85,122.01 140.95,122.11 | 149.46,119.84 141.11,119.84 | 141.11,119.84 140.85,120.09 | 141.11,119.84 140.85,119.59
+5V4
  Top 0.254: BREAKOUT4.2 131.1,42.8 131.6,42.3 131.6,35.61 F5.1 132.92,35.58 133.99,34.51 139.94,34.51 140.7,35.27 140.7,38.05 D10.A 140.85,39.59 | C14.1 140.95,42.11 | 140.95,42.11 140.59,42.11 | IC5.3 149.87,40.25 | 149.46,39.84 149.87,40.25 | UART4.4 155.38,32.78 154.67,33.49 154.67,39.08 153.91,39.84 150.28,39.84 | 149.84,39.84 149.46,39.84 | 149.84,39.84 150.28,39.84 | 150.28,39.84 149.87,40.25 | 149.87,40.25 149.87,39.87 149.84,39.84 | 140.85,39.59 140.85,40.09 | 140.85,40.09 140.85,42.01 140.95,42.11 | 149.46,39.84 141.11,39.84 | 141.11,39.84 140.85,40.09 | 141.11,39.84 140.85,39.59
+5V5
  Top 0.254: BREAKOUT5.2 77.1,42.8 77.6,42.3 77.6,35.61 F6.1 78.92,35.58 79.99,34.51 85.94,34.51 86.7,35.27 86.7,38.05 D12.A 86.86,39.59 | C17.1 86.95,42.11 | 86.95,42.11 86.59,42.11 | IC6.3 95.87,40.25 | 95.46,39.84 95.87,40.25 | UART5.4 101.38,32.78 100.67,33.49 100.67,39.08 99.91,39.84 96.28,39.84 | 95.84,39.84 95.46,39.84 | 95.84,39.84 96.28,39.84 | 96.28,39.84 95.87,40.25 | 95.87,40.25 95.87,39.87 95.84,39.84 | 86.86,39.59 86.86,40.09 | 86.86,40.09 86.86,42.01 86.95,42.11 | 95.46,39.84 87.11,39.84 | 87.11,39.84 86.86,40.09 | 87.11,39.84 86.86,39.59
+5V6
  Top 0.254: BREAKOUT6.2 23.1,42.8 23.6,42.3 23.6,35.61 F7.1 24.92,35.58 25.99,34.51 31.94,34.51 32.7,35.27 32.7,38.05 D14.A 32.85,39.59 | C20.1 32.95,42.11 | 32.95,42.11 32.59,42.11 | IC7.3 41.87,40.25 | 41.46,39.84 41.87,40.25 | UART6.4 47.38,32.78 46.67,33.49 46.67,39.08 45.91,39.84 42.28,39.84 | 41.84,39.84 41.46,39.84 | 41.84,39.84 42.28,39.84 | 42.28,39.84 41.87,40.25 | 41.87,40.25 41.87,39.87 41.84,39.84 | 32.85,39.59 32.85,40.09 | 32.85,40.09 32.85,42.01 32.95,42.11 | 41.46,39.84 33.11,39.84 | 33.11,39.84 32.85,40.09 | 33.11,39.84 32.85,39.59
+5V_FUSE1
  Top 0.152: 26.7,111.6 26.7,111.71 POWER1.A9
  Top 0.254: 26.63,111.78 POWER1.A9 26.64,113.49 26.39,113.74 23.87,113.74 | F2.2 20.67,114.22 21.14,113.74 23.33,113.74 | POWER1.B9 23.6,113.47 | 23.6,113.47 23.6,113.48 23.33,113.74 | 23.87,113.74 23.6,113.47 | 23.33,113.74 23.87,113.74
+5V_FUSE2
  Top 0.152: 80.7,111.6 80.7,111.71 POWER2.A9
  Top 0.254: 80.63,111.78 POWER2.A9 80.64,113.49 80.39,113.74 77.87,113.74 | F3.2 74.67,114.22 75.14,113.74 77.33,113.74 | POWER2.B9 77.6,113.47 | 77.6,113.47 77.6,113.48 77.33,113.74 | 77.87,113.74 77.6,113.47 | 77.33,113.74 77.87,113.74
+5V_FUSE3
  Top 0.152: 134.7,111.6 134.7,111.71 POWER3.A9
  Top 0.254: 134.63,111.78 POWER3.A9 134.64,113.49 134.39,113.74 131.87,113.74 | F4.2 128.67,114.22 129.14,113.74 131.33,113.74 | POWER3.B9 131.6,113.47 | 131.6,113.47 131.6,113.48 131.33,113.74 | 131.87,113.74 131.6,113.47 | 131.33,113.74 131.87,113.74
+5V_FUSE4
  Top 0.152: 134.7,31.6 134.7,31.71 POWER4.A9
  Top 0.254: 134.63,31.78 POWER4.A9 134.64,33.49 134.39,33.74 131.87,33.74 | F5.2 128.67,34.22 129.14,33.74 131.33,33.74 | POWER4.B9 131.6,33.47 | 131.6,33.47 131.6,33.48 131.33,33.74 | 131.87,33.74 131.6,33.47 | 131.33,33.74 131.87,33.74
+5V_FUSE5
  Top 0.152: 80.7,31.6 80.7,31.71 POWER5.A9
  Top 0.254: 80.63,31.78 POWER5.A9 80.64,33.49 80.39,33.74 77.87,33.74 | F6.2 74.67,34.22 75.14,33.74 77.33,33.74 | POWER5.B9 77.6,33.47 | 77.6,33.47 77.6,33.48 77.33,33.74 | 77.87,33.74 77.6,33.47 | 77.33,33.74 77.87,33.74
+5V_FUSE6
  Top 0.152: 26.7,31.6 26.7,31.71 POWER6.A9
  Top 0.254: 26.63,31.78 POWER6.A9 26.64,33.49 26.39,33.74 23.87,33.74 | F7.2 20.67,34.22 21.14,33.74 23.33,33.74 | POWER6.B9 23.6,33.47 | 23.6,33.47 23.6,33.48 23.33,33.74 | 23.87,33.74 23.6,33.47 | 23.33,33.74 23.87,33.74
ADC1
  Top 0.152: BREAKOUT1.12 21.64,147.4 22.18,146.86 31.07,146.86 32.44,145.49 32.44,144.48 33.11,143.81 ESP-12E/F1.2
ADC2
  Top 0.152: BREAKOUT2.12 75.64,147.4 76.18,146.86 85.07,146.86 86.44,145.49 86.44,144.48 87.11,143.81 ESP-12E/F2.2
ADC3
  Top 0.152: BREAKOUT3.12 129.64,147.4 130.18,146.86 139.07,146.86 140.44,145.49 140.44,144.48 141.11,143.81 ESP-12E/F3.2
ADC4
  Top 0.152: BREAKOUT4.12 129.64,67.4 130.18,66.86 139.07,66.86 140.44,65.49 140.44,64.48 141.11,63.81 ESP-12E/F4.2
ADC5
  Top 0.152: BREAKOUT5.12 75.64,67.4 76.18,66.86 85.07,66.86 86.44,65.49 86.44,64.48 87.11,63.81 ESP-12E/F5.2
ADC6
  Top 0.152: BREAKOUT6.12 21.64,67.4 22.18,66.86 31.07,66.86 32.44,65.49 32.44,64.48 33.11,63.81 ESP-12E/F6.2
EN1
  Top 0.152: 33.7,141.59 ESP-12E/F1.3 31.2,141.81 R14.1
EN2
  Top 0.152: 87.7,141.59 ESP-12E/F2.3 85.2,141.81 R25.1
EN3
  Top 0.152: 141.7,141.59 ESP-12E/F3.3 139.2,141.81 R36.1
EN4
  Top 0.152: 141.7,61.59 ESP-12E/F4.3 139.2,61.81 R47.1
EN5
  Top 0.152: 87.7,61.59 ESP-12E/F5.3 85.2,61.81 R58.1
EN6
  Top 0.152: 33.7,61.59 ESP-12E/F6.3 31.2,61.81 R69.1
GND1
  pour Top: 18.73,153.13 18.73,106.62 20.85,104.49 51.15,104.49 53.58,106.92 53.58,153.08 51.26,155.4 21,155.4
  cutout Top: 33.46,154.89 33.46,147.03 33.48,147.02 50.48,147.02 50.48,154.89
  pour Bottom: 18.73,153.13 18.73,106.62 20.85,104.49 51.15,104.49 53.58,106.92 53.58,153.08 51.26,155.4 21,155.4
GND2
  pour Top: 72.73,153.13 72.73,106.62 74.85,104.49 105.15,104.49 107.58,106.92 107.58,153.08 105.26,155.4 75,155.4
  cutout Top: 87.46,154.89 87.46,147.03 87.48,147.02 104.48,147.02 104.48,154.89
  pour Bottom: 72.73,153.13 72.73,106.62 74.85,104.49 105.15,104.49 107.58,106.92 107.58,153.08 105.26,155.4 75,155.4
GND3
  pour Top: 126.73,153.13 126.73,106.62 128.85,104.49 159.15,104.49 161.58,106.92 161.58,153.08 159.26,155.4 129,155.4
  cutout Top: 141.46,154.89 141.46,147.03 141.48,147.02 158.48,147.02 158.48,154.89
  pour Bottom: 126.73,153.13 126.73,106.62 128.85,104.49 159.15,104.49 161.58,106.92 161.58,153.08 159.26,155.4 129,155.4
GND4
  pour Top: 126.73,73.13 126.73,26.62 128.85,24.49 159.15,24.49 161.58,26.92 161.58,73.08 159.26,75.4 129,75.4
  cutout Top: 141.46,74.89 141.46,67.03 141.48,67.02 158.48,67.02 158.48,74.89
  pour Bottom: 126.73,73.13 126.73,26.62 128.85,24.49 159.15,24.49 161.58,26.92 161.58,73.08 159.26,75.4 129,75.4
GND5
  pour Top: 72.73,73.13 72.73,26.62 74.85,24.49 105.15,24.49 107.58,26.92 107.58,73.08 105.26,75.4 75,75.4
  cutout Top: 87.46,74.89 87.46,67.03 87.48,67.02 104.48,67.02 104.48,74.89
  pour Bottom: 72.73,73.13 72.73,26.62 74.85,24.49 105.15,24.49 107.58,26.92 107.58,73.08 105.26,75.4 75,75.4
GND6
  pour Top: 18.73,73.13 18.73,26.62 20.85,24.49 51.15,24.49 53.58,26.92 53.58,73.08 51.26,75.4 21,75.4
  cutout Top: 33.46,74.89 33.46,67.03 33.48,67.02 50.48,67.02 50.48,74.89
  pour Bottom: 18.73,73.13 18.73,26.62 20.85,24.49 51.15,24.49 53.58,26.92 53.58,73.08 51.26,75.4 21,75.4
IO1  (via drill 0.35)
  Top 0.152: ESP-12E/F1.18 49.83,137.91 41.31,137.91 40.7,137.3 v40.7,137.2 | v40.5,118.49 40.5,118.43 40.07,118 R12.1 39.13,116.62 37.37,114.86 R16.1
  Bottom 0.152: v40.7,137.2 40.5,137 v40.5,118.49
IO3  (via drill 0.35)
  Top 0.152: ESP-12E/F1.6 29.68,135.81 29.14,136.35 29.14,137.37 | 29.14,137.37 29.14,137.62 | 29.14,137.62 29.14,137.87 | 29.14,137.87 29.14,139.65 28.95,139.85 R18.1 | v25.94,142.45 25.94,138.79 27.11,137.62 28.89,137.62 | 29.14,137.62 28.89,137.62 | 28.89,137.62 29.14,137.87 | 28.89,137.62 29.14,137.37
  Bottom 0.152: v25.94,142.45 25.94,142.88 25.7,143.12 BREAKOUT1.10
IO6
  Top 0.152: ESP-12E/F1.7 28.47,133.81 27.98,134.3 R19.1 27.38,134.81 24.15,138.04 BREAKOUT1.8
IO7  (via drill 0.35)
  Top 0.152: ESP-12E/F1.5 32.22,137.81 R20.1 29.65,138.03 29.65,140.16 29.02,140.8 v26.6,140.8
  Bottom 0.152: v26.6,140.8 26.39,140.58 BREAKOUT1.9
IO8  (via drill 0.35)
  Top 0.152: ESP-12E/F1.19 39.46,139.81 v39.3,139.65
  Bottom 0.152: v39.3,139.65 30.41,139.65 29.9,139.14 29.9,133.56 29.31,132.96 BREAKOUT1.6
IO9  (via drill 0.35)
  Top 0.152: ESP-12E/F1.20 39.43,141.81 v39.3,141.68
  Bottom 0.152: v39.3,141.68 29.65,141.68 29.14,141.18 29.14,140.67 29.14,136.1 28.55,135.5 BREAKOUT1.7
IO10  (via drill 0.35)
  Top 0.152: v38.09,143.97 38.09,140.37 37.54,139.81 ESP-12E/F1.4
  Bottom 0.152: v38.09,143.97 38.09,145.16 37.6,145.66 BREAKOUT1.11
IO11  (via drill 0.35)
  Top 0.152: ESP-12E/F1.17 38.83,135.81 v38.8,135.84
  Bottom 0.152: BREAKOUT1.5 31.34,130.42 31.94,131.02 31.94,135.08 32.7,135.84 v38.8,135.84
IO17  (via drill 0.35)
  Top 0.152: R15.1 31.01,115.83 R21.2 26.41,115.83 v26.35,115.78 | ESP-12E/F1.16 39.05,133.81 v38.79,133.56
  Bottom 0.152: v38.79,133.56 38.79,116.28 38.29,115.78 v26.35,115.78 26.35,127.21 25.67,127.88 BREAKOUT1.4
IO18  (via drill 0.35)
  Top 0.152: ESP-12E/F2.18 103.83,137.91 95.31,137.91 94.7,137.3 v94.7,137.2 | v94.5,118.49 94.5,118.43 94.07,118 R23.1 93.13,116.62 91.37,114.86 R27.1
  Bottom 0.152: v94.7,137.2 94.5,137 v94.5,118.49
IO19  (via drill 0.35)
  Top 0.152: ESP-12E/F2.6 83.68,135.81 83.14,136.35 83.14,137.37 | 83.14,137.37 83.14,137.62 | 83.14,137.62 83.14,137.87 | 83.14,137.87 83.14,139.65 82.95,139.85 R29.1 | v79.94,142.45 79.94,138.79 81.11,137.62 82.89,137.62 | 83.14,137.62 82.89,137.62 | 82.89,137.62 83.14,137.87 | 82.89,137.62 83.14,137.37
  Bottom 0.152: v79.94,142.45 79.94,142.88 79.7,143.12 BREAKOUT2.10
IO20
  Top 0.152: ESP-12E/F2.7 82.47,133.81 81.98,134.3 R30.1 81.38,134.81 78.15,138.04 BREAKOUT2.8
IO21  (via drill 0.35)
  Top 0.152: ESP-12E/F2.5 86.22,137.81 R31.1 83.65,138.03 83.65,140.16 83.02,140.8 v80.6,140.8
  Bottom 0.152: v80.6,140.8 80.39,140.58 BREAKOUT2.9
IO22  (via drill 0.35)
  Top 0.152: ESP-12E/F2.19 93.46,139.81 v93.3,139.65
  Bottom 0.152: v93.3,139.65 84.41,139.65 83.9,139.14 83.9,133.56 83.31,132.96 BREAKOUT2.6
IO23  (via drill 0.35)
  Top 0.152: ESP-12E/F2.20 93.43,141.81 v93.3,141.68
  Bottom 0.152: v93.3,141.68 83.65,141.68 83.14,141.18 83.14,140.67 83.14,136.1 82.55,135.5 BREAKOUT2.7
IO24  (via drill 0.35)
  Top 0.152: v92.09,143.97 92.09,140.37 91.54,139.81 ESP-12E/F2.4
  Bottom 0.152: v92.09,143.97 92.09,145.16 91.6,145.66 BREAKOUT2.11
IO25  (via drill 0.35)
  Top 0.152: ESP-12E/F2.17 92.83,135.81 v92.8,135.84
  Bottom 0.152: BREAKOUT2.5 85.34,130.42 85.94,131.02 85.94,135.08 86.7,135.84 v92.8,135.84
IO26  (via drill 0.35)
  Top 0.152: R26.1 85.01,115.83 R32.2 80.41,115.83 v80.35,115.78 | ESP-12E/F2.16 93.05,133.81 v92.79,133.56
  Bottom 0.152: v92.79,133.56 92.79,116.28 92.29,115.78 v80.35,115.78 80.35,127.21 79.67,127.88 BREAKOUT2.4
IO27  (via drill 0.35)
  Top 0.152: ESP-12E/F3.18 157.83,137.91 149.31,137.91 148.7,137.3 v148.7,137.2 | v148.5,118.49 148.5,118.43 148.07,118 R34.1 147.13,116.62 145.37,114.86 R38.1
  Bottom 0.152: v148.7,137.2 148.5,137 v148.5,118.49
IO28  (via drill 0.35)
  Top 0.152: ESP-12E/F3.6 137.68,135.81 137.14,136.35 137.14,137.37 | 137.14,137.37 137.14,137.62 | 137.14,137.62 137.14,137.87 | 137.14,137.87 137.14,139.65 136.95,139.85 R40.1 | v133.94,142.45 133.94,138.79 135.11,137.62 136.89,137.62 | 137.14,137.62 136.89,137.62 | 136.89,137.62 137.14,137.87 | 136.89,137.62 137.14,137.37
  Bottom 0.152: v133.94,142.45 133.94,142.88 133.7,143.12 BREAKOUT3.10
IO29
  Top 0.152: ESP-12E/F3.7 136.47,133.81 135.98,134.3 R41.1 135.38,134.81 132.15,138.04 BREAKOUT3.8
IO30  (via drill 0.35)
  Top 0.152: ESP-12E/F3.5 140.22,137.81 R42.1 137.65,138.03 137.65,140.16 137.01,140.8 v134.6,140.8
  Bottom 0.152: v134.6,140.8 134.39,140.58 BREAKOUT3.9
IO31  (via drill 0.35)
  Top 0.152: ESP-12E/F3.19 147.46,139.81 v147.3,139.65
  Bottom 0.152: v147.3,139.65 138.41,139.65 137.9,139.14 137.9,133.56 137.31,132.96 BREAKOUT3.6
IO32  (via drill 0.35)
  Top 0.152: ESP-12E/F3.20 147.43,141.81 v147.3,141.68
  Bottom 0.152: v147.3,141.68 137.65,141.68 137.14,141.18 137.14,140.67 137.14,136.1 136.55,135.5 BREAKOUT3.7
IO33  (via drill 0.35)
  Top 0.152: v146.09,143.97 146.09,140.37 145.54,139.81 ESP-12E/F3.4
  Bottom 0.152: v146.09,143.97 146.09,145.16 145.6,145.66 BREAKOUT3.11
IO34  (via drill 0.35)
  Top 0.152: ESP-12E/F3.17 146.83,135.81 v146.8,135.84
  Bottom 0.152: BREAKOUT3.5 139.34,130.42 139.94,131.02 139.94,135.08 140.7,135.84 v146.8,135.84
IO35  (via drill 0.35)
  Top 0.152: R37.1 139.01,115.83 R43.2 134.41,115.83 v134.35,115.78 | ESP-12E/F3.16 147.05,133.81 v146.79,133.56
  Bottom 0.152: v146.79,133.56 146.79,116.28 146.29,115.78 v134.35,115.78 134.35,127.21 133.67,127.88 BREAKOUT3.4
IO36  (via drill 0.35)
  Top 0.152: ESP-12E/F4.18 157.83,57.91 149.31,57.91 148.7,57.3 v148.7,57.2 | v148.5,38.49 148.5,38.43 148.07,38 R45.1 147.13,36.62 145.37,34.86 R49.1
  Bottom 0.152: v148.7,57.2 148.5,57 v148.5,38.49
IO37  (via drill 0.35)
  Top 0.152: ESP-12E/F4.6 137.68,55.81 137.14,56.35 137.14,57.37 | 137.14,57.37 137.14,57.62 | 137.14,57.62 137.14,57.87 | 137.14,57.87 137.14,59.65 136.95,59.85 R51.1 | v133.94,62.45 133.94,58.79 135.11,57.62 136.89,57.62 | 137.14,57.62 136.89,57.62 | 136.89,57.62 137.14,57.87 | 136.89,57.62 137.14,57.37
  Bottom 0.152: v133.94,62.45 133.94,62.89 133.7,63.12 BREAKOUT4.10
IO38
  Top 0.152: ESP-12E/F4.7 136.47,53.81 135.98,54.3 R52.1 135.38,54.81 132.15,58.04 BREAKOUT4.8
IO39  (via drill 0.35)
  Top 0.152: ESP-12E/F4.5 140.22,57.81 R53.1 137.65,58.03 137.65,60.16 137.01,60.8 v134.6,60.8
  Bottom 0.152: v134.6,60.8 134.39,60.58 BREAKOUT4.9
IO40  (via drill 0.35)
  Top 0.152: ESP-12E/F4.19 147.46,59.81 v147.3,59.65
  Bottom 0.152: v147.3,59.65 138.41,59.65 137.9,59.14 137.9,53.56 137.31,52.96 BREAKOUT4.6
IO41  (via drill 0.35)
  Top 0.152: ESP-12E/F4.20 147.43,61.81 v147.3,61.68
  Bottom 0.152: v147.3,61.68 137.65,61.68 137.14,61.18 137.14,60.67 137.14,56.1 136.55,55.5 BREAKOUT4.7
IO42  (via drill 0.35)
  Top 0.152: v146.09,63.97 146.09,60.37 145.54,59.81 ESP-12E/F4.4
  Bottom 0.152: v146.09,63.97 146.09,65.16 145.6,65.66 BREAKOUT4.11
IO43  (via drill 0.35)
  Top 0.152: ESP-12E/F4.17 146.83,55.81 v146.8,55.84
  Bottom 0.152: BREAKOUT4.5 139.34,50.42 139.94,51.02 139.94,55.08 140.7,55.84 v146.8,55.84
IO44  (via drill 0.35)
  Top 0.152: R48.1 139.01,35.83 R54.2 134.41,35.83 v134.35,35.78 | ESP-12E/F4.16 147.05,53.81 v146.79,53.56
  Bottom 0.152: v146.79,53.56 146.79,36.28 146.29,35.78 v134.35,35.78 134.35,47.21 133.67,47.88 BREAKOUT4.4
IO45  (via drill 0.35)
  Top 0.152: ESP-12E/F5.18 103.83,57.91 95.31,57.91 94.7,57.3 v94.7,57.2 | v94.5,38.49 94.5,38.43 94.07,38 R56.1 93.13,36.62 91.37,34.86 R60.1
  Bottom 0.152: v94.7,57.2 94.5,57 v94.5,38.49
IO46  (via drill 0.35)
  Top 0.152: ESP-12E/F5.6 83.68,55.81 83.14,56.35 83.14,57.37 | 83.14,57.37 83.14,57.62 | 83.14,57.62 83.14,57.87 | 83.14,57.87 83.14,59.65 82.95,59.85 R62.1 | v79.94,62.45 79.94,58.79 81.11,57.62 82.89,57.62 | 83.14,57.62 82.89,57.62 | 82.89,57.62 83.14,57.87 | 82.89,57.62 83.14,57.37
  Bottom 0.152: v79.94,62.45 79.94,62.89 79.7,63.12 BREAKOUT5.10
IO47
  Top 0.152: ESP-12E/F5.7 82.47,53.81 81.98,54.3 R63.1 81.38,54.81 78.15,58.04 BREAKOUT5.8
IO48  (via drill 0.35)
  Top 0.152: ESP-12E/F5.5 86.22,57.81 R64.1 83.65,58.03 83.65,60.16 83.02,60.8 v80.6,60.8
  Bottom 0.152: v80.6,60.8 80.39,60.58 BREAKOUT5.9
IO49  (via drill 0.35)
  Top 0.152: ESP-12E/F5.19 93.46,59.81 v93.3,59.65
  Bottom 0.152: v93.3,59.65 84.41,59.65 83.9,59.14 83.9,53.56 83.31,52.96 BREAKOUT5.6
IO50  (via drill 0.35)
  Top 0.152: ESP-12E/F5.20 93.43,61.81 v93.3,61.68
  Bottom 0.152: v93.3,61.68 83.65,61.68 83.14,61.18 83.14,60.67 83.14,56.1 82.55,55.5 BREAKOUT5.7
IO51  (via drill 0.35)
  Top 0.152: v92.09,63.97 92.09,60.37 91.54,59.81 ESP-12E/F5.4
  Bottom 0.152: v92.09,63.97 92.09,65.16 91.6,65.66 BREAKOUT5.11
IO52  (via drill 0.35)
  Top 0.152: ESP-12E/F5.17 92.83,55.81 v92.8,55.84
  Bottom 0.152: BREAKOUT5.5 85.34,50.42 85.94,51.02 85.94,55.08 86.7,55.84 v92.8,55.84
IO53  (via drill 0.35)
  Top 0.152: R59.1 85.01,35.83 R65.2 80.41,35.83 v80.35,35.78 | ESP-12E/F5.16 93.05,53.81 v92.79,53.56
  Bottom 0.152: v92.79,53.56 92.79,36.28 92.29,35.78 v80.35,35.78 80.35,47.21 79.67,47.88 BREAKOUT5.4
IO54  (via drill 0.35)
  Top 0.152: ESP-12E/F6.18 49.83,57.91 41.31,57.91 40.7,57.3 v40.7,57.2 | v40.5,38.49 40.5,38.43 40.07,38 R67.1 39.13,36.62 37.37,34.86 R71.1
  Bottom 0.152: v40.7,57.2 40.5,57 v40.5,38.49
IO55  (via drill 0.35)
  Top 0.152: ESP-12E/F6.6 29.68,55.81 29.14,56.35 29.14,57.37 | 29.14,57.37 29.14,57.62 | 29.14,57.62 29.14,57.87 | 29.14,57.87 29.14,59.65 28.95,59.85 R73.1 | v25.94,62.45 25.94,58.79 27.11,57.62 28.89,57.62 | 29.14,57.62 28.89,57.62 | 28.89,57.62 29.14,57.87 | 28.89,57.62 29.14,57.37
  Bottom 0.152: v25.94,62.45 25.94,62.89 25.7,63.12 BREAKOUT6.10
IO56
  Top 0.152: ESP-12E/F6.7 28.47,53.81 27.98,54.3 R74.1 27.38,54.81 24.15,58.04 BREAKOUT6.8
IO57  (via drill 0.35)
  Top 0.152: ESP-12E/F6.5 32.22,57.81 R75.1 29.65,58.03 29.65,60.16 29.02,60.8 v26.6,60.8
  Bottom 0.152: v26.6,60.8 26.39,60.58 BREAKOUT6.9
IO58  (via drill 0.35)
  Top 0.152: ESP-12E/F6.19 39.46,59.81 v39.3,59.65
  Bottom 0.152: v39.3,59.65 30.41,59.65 29.9,59.14 29.9,53.56 29.31,52.96 BREAKOUT6.6
IO59  (via drill 0.35)
  Top 0.152: ESP-12E/F6.20 39.43,61.81 v39.3,61.68
  Bottom 0.152: v39.3,61.68 29.65,61.68 29.14,61.18 29.14,60.67 29.14,56.1 28.55,55.5 BREAKOUT6.7
IO60  (via drill 0.35)
  Top 0.152: v38.09,63.97 38.09,60.37 37.54,59.81 ESP-12E/F6.4
  Bottom 0.152: v38.09,63.97 38.09,65.16 37.6,65.66 BREAKOUT6.11
IO61  (via drill 0.35)
  Top 0.152: ESP-12E/F6.17 38.83,55.81 v38.8,55.84
  Bottom 0.152: BREAKOUT6.5 31.34,50.42 31.94,51.02 31.94,55.08 32.7,55.84 v38.8,55.84
IO62  (via drill 0.35)
  Top 0.152: R70.1 31.01,35.83 R76.2 26.41,35.83 v26.35,35.78 | ESP-12E/F6.16 39.05,53.81 v38.79,53.56
  Bottom 0.152: v38.79,53.56 38.79,36.28 38.29,35.78 v26.35,35.78 26.35,47.21 25.67,47.88 BREAKOUT6.4
N$1
  Top 0.152: SW4.1 40.2,113.55 39.93,113.82 R16.2
N$8
  Top 0.152: SW5.1 42.75,108.04 42.75,113.53 42.97,113.75 R17.2
N$10
  Top 0.152: R18.2 28,144.05 D3.4
N$11
  Top 0.152: 29.14,143.59 D3.5 29.69,145.2 29.14,145.75 25.84,145.75 25.33,145.24 25.33,138.53 27.21,136.65 R19.2
N$12
  Top 0.152: 31.29,144.08 D3.6 31.29,145.79 30.82,146.26 25.59,146.26 24.82,145.49 24.82,138.13 27.11,135.84 28.63,135.84 29.68,134.8 R20.2
N$13
  Top 0.152: R21.1 28,121.1 28.61,121.71 SW6.1
N$14
  Top 0.152: R22.2 35,117.8 D4.C
N$15
  Top 0.152: SW7.1 94.2,113.55 93.93,113.82 R27.2
N$16
  Top 0.152: SW8.1 96.75,108.04 96.75,113.53 96.97,113.75 R28.2
N$17
  Top 0.152: R29.2 82,144.05 D5.4
N$18
  Top 0.152: 83.14,143.59 D5.5 83.69,145.2 83.14,145.75 79.84,145.75 79.33,145.24 79.33,138.53 81.21,136.65 R30.2
N$19
  Top 0.152: 85.29,144.08 D5.6 85.29,145.79 84.82,146.26 79.59,146.26 78.82,145.49 78.82,138.13 81.11,135.84 82.63,135.84 83.68,134.8 R31.2
N$20
  Top 0.152: R32.1 82,121.1 82.61,121.71 SW9.1
N$21
  Top 0.152: R33.2 89,117.8 D6.C
N$22
  Top 0.152: SW10.1 148.2,113.55 147.93,113.82 R38.2
N$23
  Top 0.152: SW11.1 150.75,108.04 150.75,113.53 150.97,113.75 R39.2
N$24
  Top 0.152: R40.2 136,144.05 D7.4
N$25
  Top 0.152: 137.14,143.59 D7.5 137.69,145.2 137.14,145.75 133.84,145.75 133.33,145.24 133.33,138.53 135.21,136.65 R41.2
N$26
  Top 0.152: 139.29,144.08 D7.6 139.29,145.79 138.82,146.26 133.59,146.26 132.82,145.49 132.82,138.13 135.11,135.84 136.63,135.84 137.68,134.8 R42.2
N$27
  Top 0.152: R43.1 136,121.1 136.61,121.71 SW12.1
N$28
  Top 0.152: R44.2 143,117.8 D8.C
N$29
  Top 0.152: SW13.1 148.2,33.55 147.93,33.82 R49.2
N$30
  Top 0.152: SW14.1 150.75,28.04 150.75,33.53 150.97,33.75 R50.2
N$31
  Top 0.152: R51.2 136,64.05 D9.4
N$32
  Top 0.152: 137.14,63.59 D9.5 137.69,65.2 137.14,65.75 133.84,65.75 133.33,65.24 133.33,58.53 135.21,56.65 R52.2
N$33
  Top 0.152: 139.29,64.08 D9.6 139.29,65.79 138.82,66.26 133.59,66.26 132.82,65.49 132.82,58.13 135.11,55.84 136.63,55.84 137.68,54.8 R53.2
N$34
  Top 0.152: R54.1 136,41.1 136.61,41.71 SW15.1
N$35
  Top 0.152: R55.2 143,37.8 D10.C
N$36
  Top 0.152: SW16.1 94.2,33.55 93.93,33.82 R60.2
N$37
  Top 0.152: SW17.1 96.75,28.04 96.75,33.53 96.97,33.75 R61.2
N$38
  Top 0.152: R62.2 82,64.05 D11.4
N$39
  Top 0.152: 83.14,63.59 D11.5 83.69,65.2 83.14,65.75 79.84,65.75 79.33,65.24 79.33,58.53 81.21,56.65 R63.2
N$40
  Top 0.152: 85.29,64.08 D11.6 85.29,65.79 84.82,66.26 79.59,66.26 78.82,65.49 78.82,58.13 81.11,55.84 82.63,55.84 83.68,54.8 R64.2
N$41
  Top 0.152: R65.1 82,41.1 82.61,41.71 SW18.1
N$42
  Top 0.152: R66.2 89,37.8 D12.C
N$43
  Top 0.152: SW19.1 40.2,33.55 39.93,33.82 R71.2
N$44
  Top 0.152: SW20.1 42.75,28.04 42.75,33.53 42.97,33.75 R72.2
N$45
  Top 0.152: R73.2 28,64.05 D13.4
N$46
  Top 0.152: 29.14,63.59 D13.5 29.69,65.2 29.14,65.75 25.84,65.75 25.33,65.24 25.33,58.53 27.21,56.65 R74.2
N$47
  Top 0.152: 31.29,64.08 D13.6 31.29,65.79 30.82,66.26 25.59,66.26 24.82,65.49 24.82,58.13 27.11,55.84 28.63,55.84 29.68,54.8 R75.2
N$48
  Top 0.152: R76.1 28,41.1 28.61,41.71 SW21.1
N$49
  Top 0.152: R77.2 35,37.8 D14.C
RST1  (via drill 0.35)
  Top 0.152: v45.2,118.24 45.2,118.2 45,118 R13.1 43.63,116.54 41.79,114.71 R17.1 | ESP-12E/F1.1 44.57,145.81 v45.14,145.24
  Bottom 0.152: v45.14,145.24 45.2,145.18 v45.2,118.24
RST2  (via drill 0.35)
  Top 0.152: v99.2,118.24 99.2,118.2 99,118 R24.1 97.62,116.54 95.79,114.71 R28.1 | ESP-12E/F2.1 98.57,145.81 v99.14,145.24
  Bottom 0.152: v99.14,145.24 99.2,145.18 v99.2,118.24
RST3  (via drill 0.35)
  Top 0.152: v153.2,118.24 153.2,118.2 153,118 R35.1 151.63,116.54 149.79,114.71 R39.1 | ESP-12E/F3.1 152.57,145.81 v153.14,145.24
  Bottom 0.152: v153.14,145.24 153.2,145.18 v153.2,118.24
RST4  (via drill 0.35)
  Top 0.152: v153.2,38.24 153.2,38.2 153,38 R46.1 151.63,36.54 149.79,34.71 R50.1 | ESP-12E/F4.1 152.57,65.81 v153.14,65.24
  Bottom 0.152: v153.14,65.24 153.2,65.18 v153.2,38.24
RST5  (via drill 0.35)
  Top 0.152: v99.2,38.24 99.2,38.2 99,38 R57.1 97.62,36.54 95.79,34.71 R61.1 | ESP-12E/F5.1 98.57,65.81 v99.14,65.24
  Bottom 0.152: v99.14,65.24 99.2,65.18 v99.2,38.24
RST6  (via drill 0.35)
  Top 0.152: v45.2,38.24 45.2,38.2 45,38 R68.1 43.63,36.54 41.79,34.71 R72.1 | ESP-12E/F6.1 44.57,65.81 v45.14,65.24
  Bottom 0.152: v45.14,65.24 45.2,65.18 v45.2,38.24
RXD1
  Top 0.152: ESP-12E/F1.21 51.19,143.81 51.9,143.1 51.9,116.2 51,115.3 49.18,115.3 UART1.3
RXD2
  Top 0.152: ESP-12E/F2.21 105.19,143.81 105.9,143.1 105.9,116.2 105,115.3 103.18,115.3 UART2.3
RXD3
  Top 0.152: ESP-12E/F3.21 159.19,143.81 159.9,143.1 159.9,116.2 159,115.3 157.18,115.3 UART3.3
RXD4
  Top 0.152: ESP-12E/F4.21 159.19,63.81 159.9,63.1 159.9,36.2 159,35.3 157.18,35.3 UART4.3
RXD5
  Top 0.152: ESP-12E/F5.21 105.19,63.81 105.9,63.1 105.9,36.2 105,35.3 103.18,35.3 UART5.3
RXD6
  Top 0.152: ESP-12E/F6.21 51.19,63.81 51.9,63.1 51.9,36.2 51,35.3 49.18,35.3 UART6.3
TXD1  (via drill 0.35)
  Top 0.152: ESP-12E/F1.22 47.01,145.81 v46.4,145.2
  Bottom 0.152: v46.4,145.2 46.4,118.5 47.04,117.86 UART1.2
TXD2  (via drill 0.35)
  Top 0.152: ESP-12E/F2.22 101.01,145.81 v100.4,145.2
  Bottom 0.152: v100.4,145.2 100.4,118.5 101.04,117.86 UART2.2
TXD3  (via drill 0.35)
  Top 0.152: ESP-12E/F3.22 155.01,145.81 v154.4,145.2
  Bottom 0.152: v154.4,145.2 154.4,118.5 155.04,117.86 UART3.2
TXD4  (via drill 0.35)
  Top 0.152: ESP-12E/F4.22 155.01,65.81 v154.4,65.2
  Bottom 0.152: v154.4,65.2 154.4,38.5 155.04,37.86 UART4.2
TXD5  (via drill 0.35)
  Top 0.152: ESP-12E/F5.22 101.01,65.81 v100.4,65.2
  Bottom 0.152: v100.4,65.2 100.4,38.5 101.04,37.86 UART5.2
TXD6  (via drill 0.35)
  Top 0.152: ESP-12E/F6.22 47.01,65.81 v46.4,65.2
  Bottom 0.152: v46.4,65.2 46.4,38.5 47.04,37.86 UART6.2

## Text on the board
tPlace: Designed by B401 | Designed by B401 | Designed by B401 | Robotics and Intelligent / System | Robotics and Intelligent / System | Robotics and Intelligent / System | Designed by B401 | Designed by B401 | Designed by B401 | Robotics and Intelligent / System | Robotics and Intelligent / System | Robotics and Intelligent / System
tNames: KEY | KEY | KEY | GND 5V 3V3 D8 D4 D2 D1 D7 D5 D6 D0 A0 | GND 5V 3V3 D8 D4 D2 D1 D7 D5 D6 D0 A0 | GND 5V 3V3 D8 D4 D2 D1 D7 D5 D6 D0 A0 | 5V RXD TXD GND | 5V RXD TXD GND | 5V RXD TXD GND | BOOT | RESET | BOOT | RESET | BOOT | RESET | KEY | KEY | KEY | GND 5V 3V3 D8 D4 D2 D1 D7 D5 D6 D0 A0 | GND 5V 3V3 D8 D4 D2 D1 D7 D5 D6 D0 A0 | GND 5V 3V3 D8 D4 D2 D1 D7 D5 D6 D0 A0 | 5V RXD TXD GND | 5V RXD TXD GND | 5V RXD TXD GND | BOOT | RESET | BOOT | RESET | BOOT | RESET